# Altium PCB HT_L293D_Driver.PcbDoc
Units mm, origin at the board's own origin, x right, y up, seen from the top; angles counter-clockwise.
Board outline 48.87 x 70 mm, 2 copper layers (Top Layer, Bottom Layer), stack 0.388 mm thick; 40 components, 38 nets, 174 pads, 4 vias.
Unrouted connection lines stored in the file: 3.
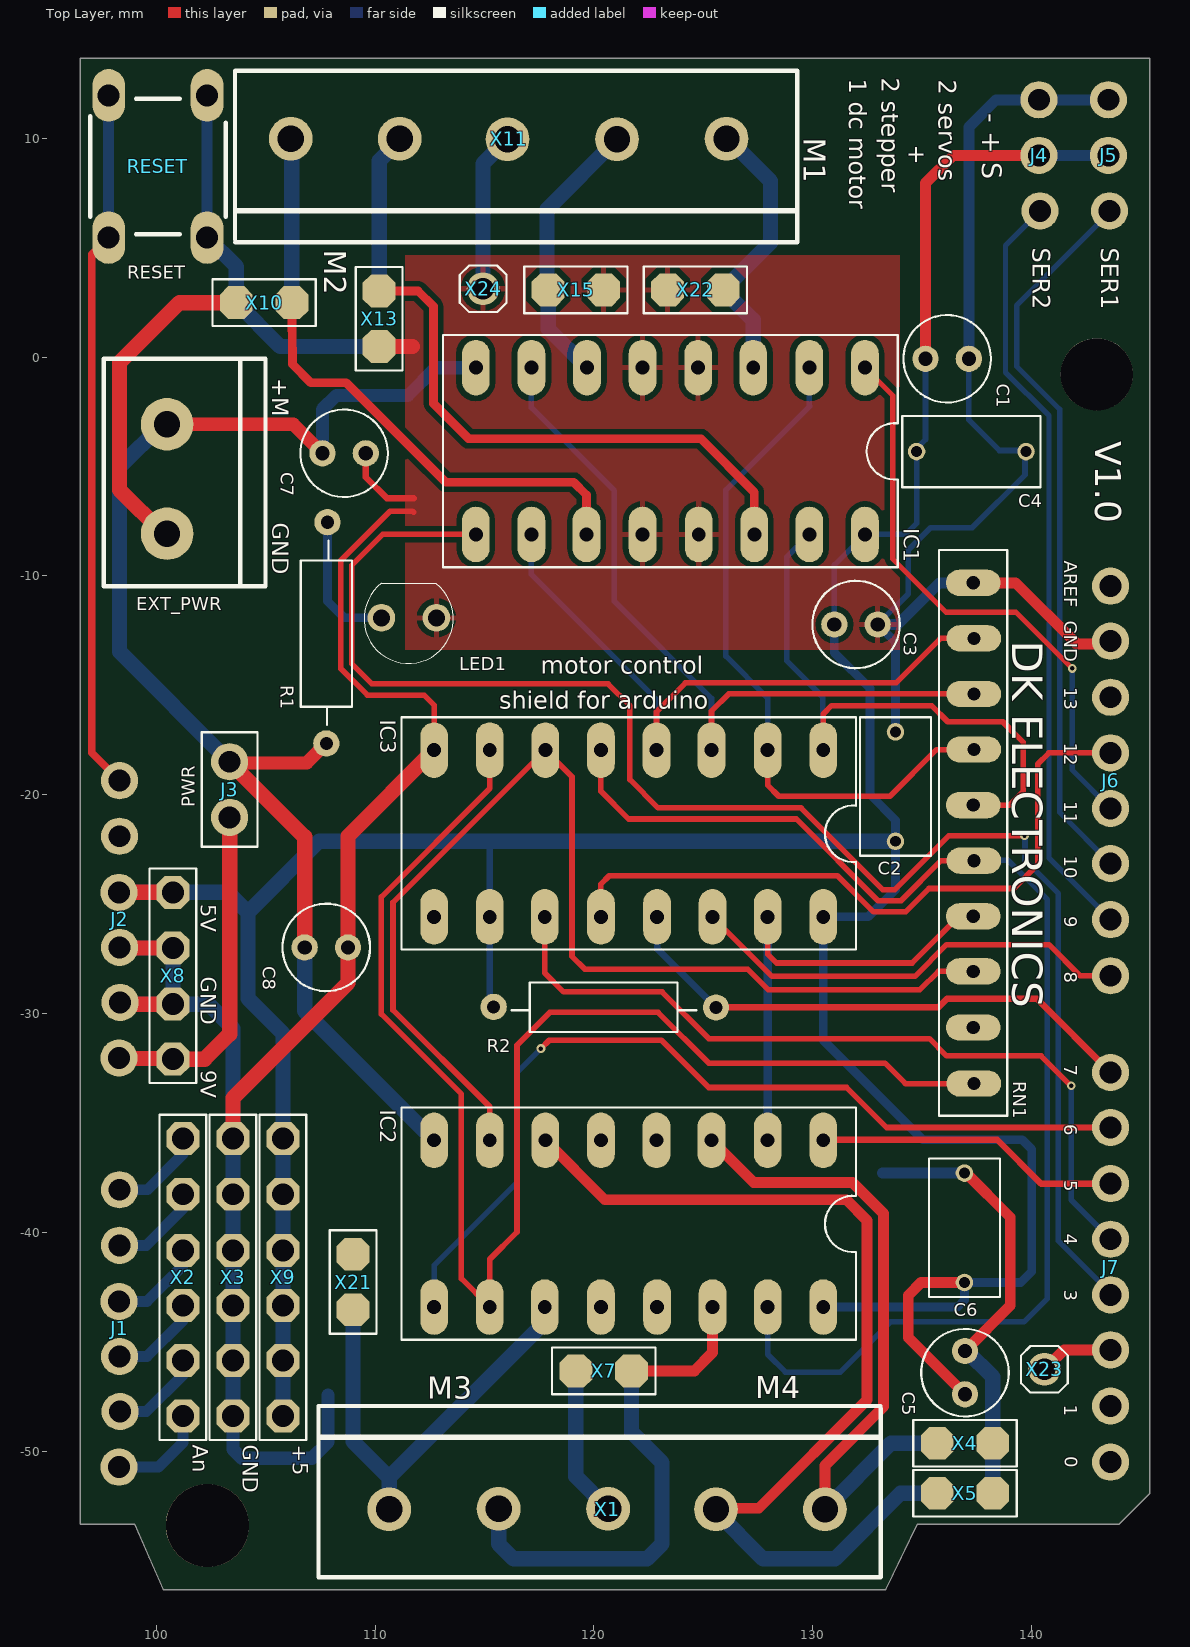
[diagram p0: Top Layer view]
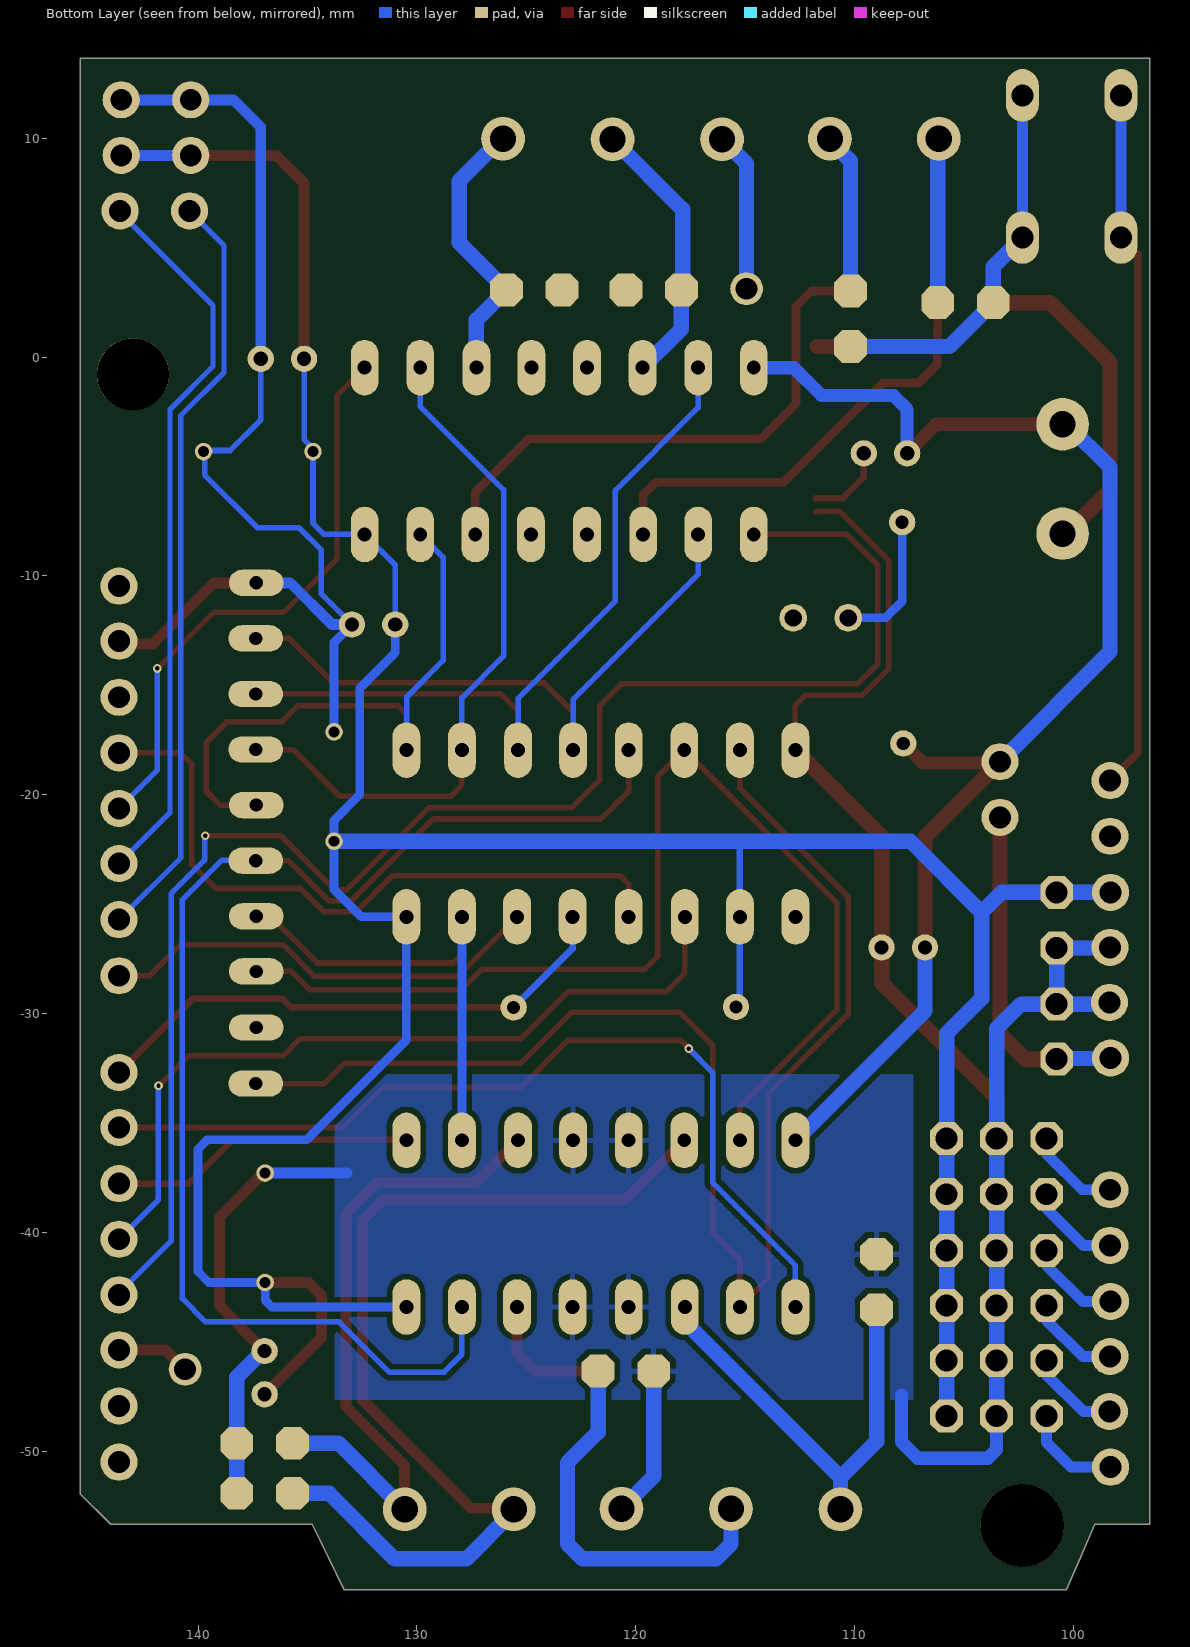
[diagram p1: Bottom Layer view, seen from below]
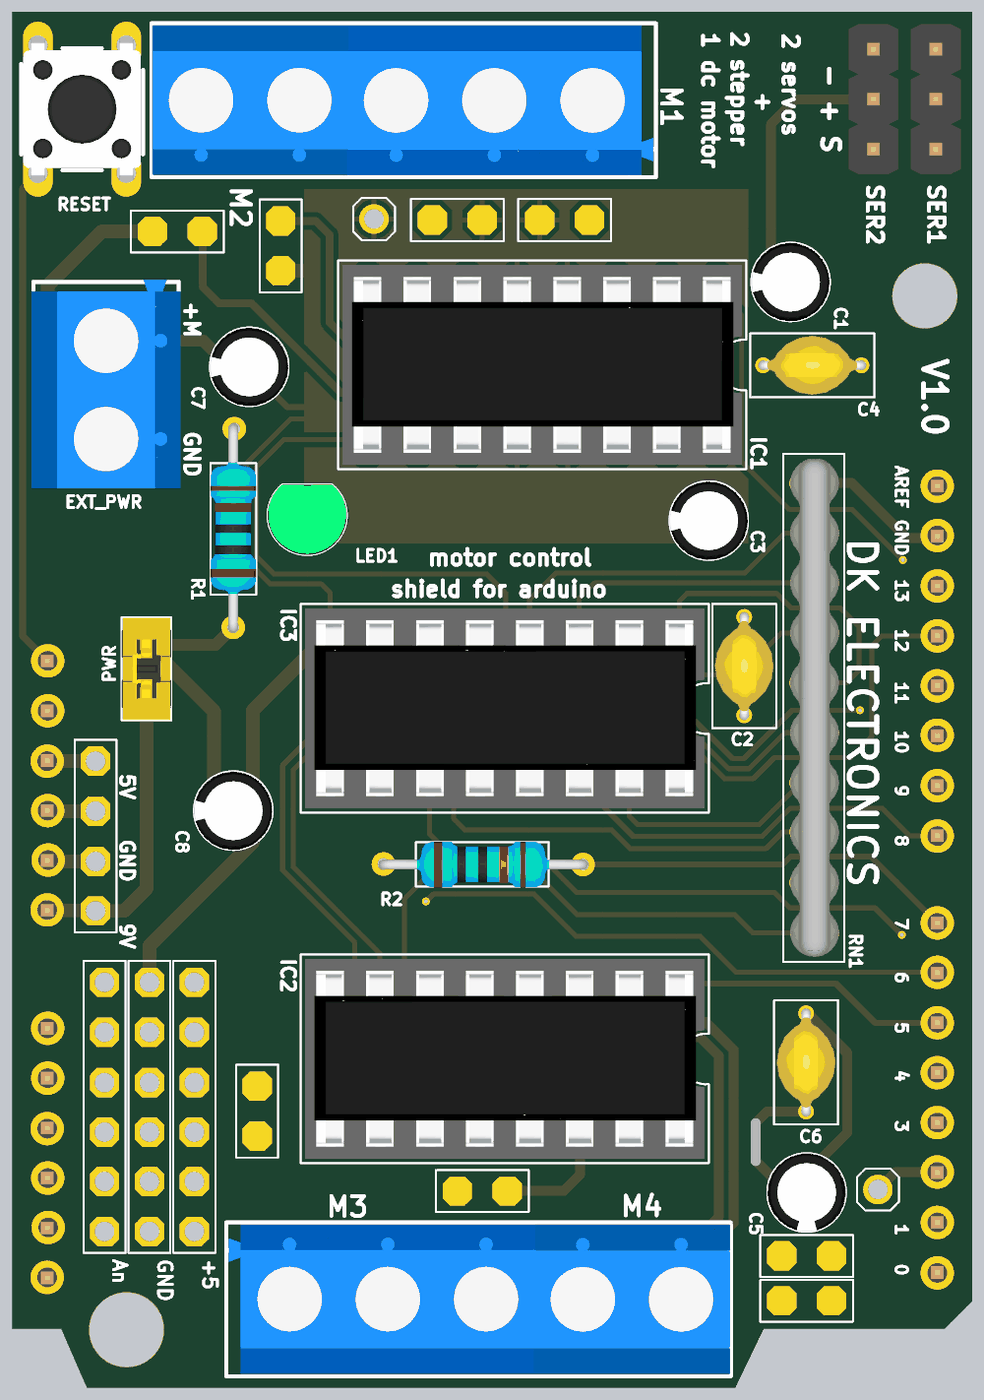
[diagram p2: 3D render of the assembled board from above, using the file's embedded part models]

## Layer stack, top to bottom
Top Solder: solder mask 0.0254, SM-001, Dk 4
Top Layer: signal copper 0.044
Dielectric 1: prepreg 0.3, PP-006, Dk 4.1
Bottom Layer: signal copper 0.044
Bottom Solder: solder mask 0.0254, SM-001, Dk 4

## Board outline
96.52,-53.335 96.52,13.665 145.39,13.665 145.39,-51.938 143.993,-53.335 134.772,-53.335 133.327,-56.335 100.33,-56.335 cw(c274.551,21.528) 99.02,-53.335

## Design rules (kind name [scope] priority, off if disabled: settings)
Clearance [All] p1: gap=0.254 ignorepadtopadclearanceinfootprint=FALSE except(0: Arc-Hole Track-Hole SMDPad-Hole THPad-Hole Via-Hole Fill-Hole Poly-Hole Region-Hole Text-Hole)
HoleSize [IsPad] p1: absolutevalues=TRUE maxlimit=2.54 minlimit=0.025 maxpercent=80.000 minpercent=20.000
PolygonConnect [All] p1: connectstyle=Relief reliefconductorwidth=0.254 reliefentries=4 polygonreliefangle="90 Angle" airgapwidth=0.254
RoutingVias [All] p1: holewidth=0.711 width=1.27 viastyle="Through Hole" minholewidth=0.711 minwidth=1.27 maxholewidth=0.711 maxwidth=1.27
SolderMaskExpansion [All] p1: expansion=0
Width [All] p1: maxlimit=0.254 minlimit=0.254 preferedwidth=0.254
29 further rules are at their usual default settings.

## Components (designator, comment, footprint, x,y, rotation, side; value= is the part's Value field where it differs from the comment)
C1 "Aluminum_Electrolytic_Capacitor" ALUMINUM_ELECTROLYTIC_CAPACITOR 134.722,-0.025 r0 top value=16VDC
C2 "Film capacitor, 10μF, 450VDC, ±10%, 10.9mOhm, 31.5x15 mm, -40...+105°C" CERAMIC_CAPACITOR_0.1UF 133.782,-22.123 r90 top value=10µF
C3 "Aluminum_Electrolytic_Capacitor" ALUMINUM_ELECTROLYTIC_CAPACITOR 130.556,-12.167 r0 top value=100uF
C4 "Film capacitor, 0.1μF, 450VDC, ±10%, 10.9mOhm, 31.5x15 mm, -40...+105°C" CERAMIC_CAPACITOR_0.1UF 134.747,-4.318 r0 top value=0.1µF
C5 "Aluminum_Electrolytic_Capacitor" ALUMINUM_ELECTROLYTIC_CAPACITOR 136.906,-47.828 r90 top value=100uF
C6 "Film capacitor, 0.1μF, 450VDC, ±10%, 10.9mOhm, 31.5x15 mm, -40...+105°C" CERAMIC_CAPACITOR_0.1UF 136.931,-42.287 r90 top value=0.1µF
C7 "Aluminum_Electrolytic_Capacitor" ALUMINUM_ELECTROLYTIC_CAPACITOR 107.163,-4.343 r0 top value=100uF
C8 "Aluminum_Electrolytic_Capacitor" ALUMINUM_ELECTROLYTIC_CAPACITOR 106.35,-26.924 r0 top value=100uF
EXT_PWR "Terminal connector, 2pin, 3.5mm, 300VAC, 10A" TERMINAL_BLOCK_2PIN 101.524,-5.563 r270 top
IC1 "L293D" L293D_WITH_DIP16 132.613,3.277 r270 top
IC2 "L293D" L293D_WITH_DIP16 130.708,-32.029 r270 top
IC3 "SN74HC595N" L293D_WITH_DIP16 130.708,-14.199 r270 top
J1 "Headers_6PIN" HEADERS_6PIN 98.4,-38.252 r0 top
J2 "Headers_6PIN" HEADERS_6PIN 98.4,-19.558 r0 top
J3 "Headers_2PIN" HEADERS_2PIN 103.454,-18.517 r0 top
J4 "Headers_3PIN" HEADERS_3PIN 140.462,11.709 r0 top
J5 "Headers_3PIN" HEADERS_3PIN 143.637,11.709 r0 top
J6 "Headers_8PIN" HEADERS_8PIN 143.561,-10.897 r0 top
J7 "Headers_8PIN" HEADERS_8PIN 143.561,-33.122 r0 top
LED1 "LED, Green, *, *, *, -55...+150°C" GREEN_LED_3MM 112.827,-12.141 r180 top
R1 "Resistor film, 1K, , 0201, 0.05W, -55...+125°C" RESISTOR_TH_1K 107.95,-17.704 r90 top value=1K
R2 "" RESISTOR_TH_10K 115.418,-29.845 r0 top value=10K
RESET "1825910-6" 1825910-6 100.076,8.712 r0 top
RN1 "Resistor_Network_10K" RESISTOR_NETWORK_10K 137.008,-10.109 r0 top
X1 "Terminal connector, 3pin, 3.5mm, 300VAC, 10A" TERMINAL_BLOCK_5PIN 115.621,-52.654 r0 top
X2 "Pad_6PIN" PAD_6PIN 101.27,-35.916 r0 top
X3 "Pad_6PIN" PAD_6PIN 103.556,-35.916 r0 top
X4 "Pad_2PIN" PAD_2PIN 135.89,-49.581 r90 top
X5 "Pad_2PIN" PAD_2PIN 135.89,-51.867 r90 top
X7 "Pad_2PIN" PAD_2PIN 119.38,-46.279 r90 top
X8 "Pad_4PIN" PAD_4PIN 100.813,-24.663 r0 top
X9 "Pad_6PIN" PAD_6PIN 105.842,-35.916 r0 top
X10 "Pad_2PIN" PAD_2PIN 103.861,2.54 r90 top
X11 "Terminal connector, 3pin, 3.5mm, 300VAC, 10A" TERMINAL_BLOCK_5PIN 121.082,9.982 r180 top
X13 "Pad_2PIN" PAD_2PIN 110.236,2.819 r0 top
X15 "Pad_2PIN" PAD_2PIN 118.11,3.124 r90 top
X21 "Pad_2PIN" PAD_2PIN 109.042,-41.199 r0 top
X22 "Pad_2PIN" PAD_2PIN 123.571,3.124 r90 top
X23 "Pad_1PIN" PAD_1PIN 140.64,-46.457 r0 top
X24 "Pad_1PIN" PAD_1PIN 114.986,2.921 r0 top

## Footprints (in the part's own frame and the unit in brackets; to place one, negate y for a bottom-side part, rotate by r counter-clockwise, add the part's x,y. Pads: shape width x height; smd on the part's side, far side on the other; paste and mask are expansions set on the pad)
1825910-6 [mm]
  oval 1.5x2.4 hole 1: 1(2.25,3.25) 2(2.25,-3.25) 3(-2.25,3.25) 4(-2.25,-3.25)
  silkscreen extent -3.1,-3.1 3.1,3.1, body extent -3,-3.9 2.99,3.9, height 5
ALUMINUM_ELECTROLYTIC_CAPACITOR [mm]
  round 1.2 hole 0.65: 1(0.432,-0.051) 2(2.413,-0.051)
  silkscreen extent -0.57,-2.05 3.42,1.95, body extent -0.57,-2.06 3.42,1.94, height 8.12
CERAMIC_CAPACITOR_0.1UF [mm]
  round 0.8 hole 0.5: 1(0,0) 2(5,0)
  silkscreen extent -0.66,-1.63 5.66,1.63, body extent -0.22,-1.5 5.22,1.5, height 4.72
GREEN_LED_3MM [mil]
  round 50 hole 30.71: 1(1,-9) 2(100,-9)
  silkscreen extent -29,-71 131,73, body extent -27,-68 130,70, height 220
HEADERS_2PIN [mm]
  round 1.7 hole 1: 1(-0.102,0.025) 2(-0.102,-2.515)
  silkscreen extent -1.37,-3.86 1.17,1.37, body extent -1.37,-3.84 1.17,1.36, height 8.8
HEADERS_3PIN [mm]
  round 1.7 hole 1: 1(-0.127,0.051) 2(-0.127,-2.489) 3(-0.076,-5.029)
  body extent -1.37,-6.3 1.17,1.32, height 8.76
HEADERS_6PIN [mm]
  round 1.7 hole 1: 1(-0.076,0.203) 2(-0.076,-2.337) 3(-0.102,-4.902) 4(-0.076,-7.417) 5(-0.051,-9.931) 6(-0.102,-12.471)
  body extent -1.37,-13.77 1.17,1.47, height 2.68
HEADERS_8PIN [mm]
  round 1.7 hole 1: 1(0.051,0.432) 2(0.051,-2.083) 3(0.051,-4.648) 4(0.051,-7.188) 5(0.051,-9.728) 6(0.051,-12.243) 7(0.051,-14.808) 8(0.051,-17.374)
  body extent -1.22,-18.62 1.32,1.7, height 2.68
L293D_WITH_DIP16 [mil]
  oval 100x50 hole 25: 1(148,-9) 2(148,-109) 3(148,-210) 4(148,-309) 5(148,-409) 6(148,-509) 7(148,-609) 8(148,-709) 9(448,-709) 10(448,-609) 11(448,-510) 12(448,-409) 13(448,-308) 14(448,-208) 15(448,-109) 16(448,-9)
  silkscreen extent 89,-768 507,50, body extent 98,-759 498,41, height 329
PAD_1PIN [mm]
  round 1.5 hole 1: 1(-0.051,0.203)
  silkscreen extent -1.12,-0.86 1.02,1.27
PAD_2PIN [mm]
  oct 1.5x1.5 all layers, no hole: 1(-0.051,0.203) 2(-0.051,-2.337)
  silkscreen extent -1.12,-3.43 1.02,1.3
PAD_4PIN [mm]
  oct 1.5x1.5 hole 1: 1(-0.051,0.203) 2(-0.051,-2.337) 3(-0.051,-4.902) 4(-0.051,-7.417)
  silkscreen extent -1.12,-8.51 1.02,1.3
PAD_6PIN [mm]
  oct 1.5x1.5 hole 1: 1(-0.051,0.203) 2(-0.051,-2.337) 3(-0.051,-4.902) 4(-0.051,-7.417) 5(-0.051,-9.931) 6(-0.051,-12.471)
  silkscreen extent -1.12,-13.56 1.02,1.3
RESISTOR_NETWORK_10K [mm]
  oval 2.5x1.2 hole 0.6: 1(0.33,-0.203) 2(0.356,-2.743) 3(0.356,-5.283) 4(0.356,-7.823) 5(0.33,-10.363) 6(0.356,-12.903) 7(0.33,-15.443) 8(0.33,-17.958) 9(0.33,-20.523) 10(0.356,-23.089)
  silkscreen extent -1.24,-24.56 1.88,1.3, body extent -0.89,-24.31 1.6,1.04, height 2.84
RESISTOR_TH_1K [mm]
  round 1.2 hole 0.6: 1(0.051,0.178) 2(10.16,0.127)
  silkscreen extent 0.89,-0.99 9.32,1.35, body extent -0.22,-0.99 10.43,1.35, height 2.51
RESISTOR_TH_10K [mm]
  round 1.2 hole 0.6: 1(0,0.152) 2(10.16,0.127)
  silkscreen extent 0.81,-0.99 9.27,1.27, body extent -0.25,-1.04 10.41,1.29, height 2.51
TERMINAL_BLOCK_2PIN [mm]
  round 2.4 hole 1.2: 1(2.506,-1.03) 2(-2.494,-1.03)
  silkscreen extent -5.49,-3.93 4.91,3.47, body extent -5.59,-4.03 5.01,3.57, height 10.13
TERMINAL_BLOCK_5PIN [mm]
  round 2 hole 1.2: 1(-4.978,0) 2(0.025,0.025) 3(5.029,0.025) 4(9.957,0) 5(14.935,0)
  silkscreen extent -8.2,-3.1 17.48,4.72, body extent -8.08,-2.99 17.45,4.62, height 10.13

## Part data
C1: "Capacitor Polarised", Manufacturer_Name="United Chemi-Con", Manufacturer_Part_Number=EKY-350ETC221MH15D, Mouser Part Number=N/A, Voltage=100uF, Datasheet Link=http://www.mouser.com/datasheet/2/420/United-Chemi-Con-1109128.pdf, Height=21.5mm, Mouser Price/Stock=https://www.mouser.com/Search/Refine.aspx?Keyword=N%2FA
C2: library part Ceramic_Capacitor, Manufacturer=Epcos, Package="31.5x15 mm", PartNumber=B32774D4106K000, Temperature=-40...+105°C, Tolerance=±10%, TypeCapacitor="Film capacitor", ValueManufacturerPartNumber="Film capacitor, 10µF, 450VDC, ±10%, 10.9mOhm, 31.5x15 mm, -40...+105°C", Voltage=450VDC, HelpURL=https://www.digikey.com/products/en/capacitors/film-capacitors/62?k=&pkeyword=&sv=0&pv2097=1958&sf=0&FV=fffc01ef%2C1f140000%2Cffe0003e%2Cffec6366&quantity=1&ColumnSort=1000011&page=1&stock=1&pageSize=25, Impedance=10.9mOhm
C3 C5 C7 C8: "Capacitor Polarised", Manufacturer_Name="United Chemi-Con", Manufacturer_Part_Number=EKY-350ETC221MH15D, Mouser Part Number=N/A, Voltage=16VDC, Datasheet Link=http://www.mouser.com/datasheet/2/420/United-Chemi-Con-1109128.pdf, Height=21.5mm, Mouser Price/Stock=https://www.mouser.com/Search/Refine.aspx?Keyword=N%2FA
C4: library part Ceramic_Capacitor, "Capacitor Non Polarised", Manufacturer=Epcos, Package="31.5x15 mm", PartNumber=B32774D4106K000, Temperature=-40...+105°C, Tolerance=±10%, TypeCapacitor="Film capacitor", ValueManufacturerPartNumber="Film capacitor, 0.1µF, 450VDC, ±10%, 10.9mOhm, 31.5x15 mm, -40...+105°C", Voltage=450VDC, HelpURL=https://www.digikey.com/products/en/capacitors/film-capacitors/62?k=&pkeyword=&sv=0&pv2097=1958&sf=0&FV=fffc01ef%2C1f140000%2Cffe0003e%2Cffec6366&quantity=1&ColumnSort=1000011&page=1&stock=1&pageSize=25, Impedance=10.9mOhm
C6: library part Ceramic_Capacitor, Manufacturer=Epcos, Package="31.5x15 mm", PartNumber=B32774D4106K000, Temperature=-40...+105°C, Tolerance=±10%, TypeCapacitor="Film capacitor", ValueManufacturerPartNumber="Film capacitor, 0.1µF, 450VDC, ±10%, 10.9mOhm, 31.5x15 mm, -40...+105°C", Voltage=450VDC, HelpURL=https://www.digikey.com/products/en/capacitors/film-capacitors/62?k=&pkeyword=&sv=0&pv2097=1958&sf=0&FV=fffc01ef%2C1f140000%2Cffe0003e%2Cffec6366&quantity=1&ColumnSort=1000011&page=1&stock=1&pageSize=25, Impedance=10.9mOhm
EXT_PWR: library part Terminal_Block_2PIN, CurrentMax=10A, Manufacturer=Degson, PartNumber=DG350-3.5-02P-14, VoltageMax=300VAC, CommentText="\"??????\"", HelpURL=https://www.chipdip.ru/product/dg350-3.5-02p-12, Multichannel=2pin, Pitch=3.5mm, TypeConnector="Terminal connector", ValueManufacturerPartNumber="Terminal connector, 2pin, 3.5mm, 300VAC, 10A"
IC1 IC2: "Integrated Circuit", Manufacturer_Name=STMicroelectronics, Mouser Part Number=511-L293D, Arrow Part Number=L293D, Arrow Price/Stock=https://www.arrow.com/en/products/l293d/stmicroelectronics?region=nac, Datasheet Link=http://www.st.com/web/en/resource/technical/document/datasheet/CD00000059.pdf, Height=5.1mm, Manufacturer_Part_Number=L293D, Mouser Price/Stock=https://www.mouser.co.uk/ProductDetail/STMicroelectronics/L293D?qs=gr8Zi5OG3MgMJ1ICDzLQbg%3D%3D
IC3: "Integrated Circuit", Manufacturer_Name="Texas Instruments", Mouser Part Number=595-SN74HC595N, Arrow Part Number=SN74HC595N, Arrow Price/Stock=https://www.arrow.com/en/products/sn74hc595n/texas-instruments?region=nac, Datasheet Link=http://www.ti.com/lit/ds/symlink/sn74hc595.pdf, Height=5.08mm, Manufacturer_Part_Number=SN74HC595N, Mouser Price/Stock=https://www.mouser.co.uk/ProductDetail/Texas-Instruments/SN74HC595N?qs=IEl3ej0IqwBTHkYa8XPoMQ%3D%3D
J1 J2 J3 J4 J5 J6 J7: Package=None, Availability=Unavailable, MF="{'manufacturer': u'TE Connectivity'}", MP=87227-3, Price=None
LED1: library part Green_LED_3mm, ColorParameter=Green, Temperature=-55...+150°C, TypeDiode=LED, ValueManufacturerPartNumber="LED, Green, *, *, *, -55...+150°C"
R1: library part Resistor_1K, Manufacturer=Yageo, Package=0201, PartNumber=RC0201JR-07100RL, Power=0.05W, Temperature=-55...+125°C, TypeResistor="Resistor film", HelpURL=https://www.digikey.com/product-detail/en/yageo/RC0201JR-07100RL/311-100NCT-ND/1949006, ValueManufacturerPartNumber="Resistor film, 1K, , 0201, 0.05W, -55...+125°C"
R2: library part Resistor_10K, Manufacturer=Yageo, Package=0201, PartNumber=RC0201JR-07100RL, Power=0.05W, Temperature=-55...+125°C, TypeResistor="Resistor film", ValueManufacturerPartNumber="Resistor film, 10K, , 0201, 0.05W, -55...+125°C", HelpURL=https://www.digikey.com/product-detail/en/yageo/RC0201JR-07100RL/311-100NCT-ND/1949006
RESET: library part Button_Reset, "SWITCH TACTILE SPST-NO 0.05A 24V", Contact Rating @ Voltage="0.05A @ 24VDC", Illumination Type, Color=-, Manufacturer="TE Connectivity", Operating Force=160gf, Operating Temperature="-35°C ~ 85°C", Supplier Part Number 1=450-1650-ND, .Checked PCB=RF, .Checked SCH=RF, .Creator=MM, Actuator Height off PCB, from Pins=5.00mm, Actuator Material="Polybutylene Terephthalate (PBT)", Actuator Orientation="Top Actuated", Actuator Type=Standard, Category=Switches, Circuit=SPST-NO, ComponentLink1Description=http://www.te.com/commerce/DocumentDelivery/DDEController?Action=srchrtrv&DocNm=1825910&DocType=Customer+Drawing&DocLang=English, ComponentLink1URL=http://www.te.com/commerce/DocumentDelivery/DDEController?Action=srchrtrv&DocNm=1825910&DocType=Customer+Drawing&DocLang=English, Features=-, Illumination=Non-Illuminated, Illumination Voltage (Nominal)=-, Ingress Protection=-, Manufacturer Part Number=1825910-6, Mechanical Life="100,000 Cycles", Mounting Type="Through Hole", Outline="6.00mm x 6.00mm", Packaging=Bulk, Pricing 1="1=0.1, 10=0.095, 25=0.0912, 50=0.088, 100=0.0831, 250=0.07824, 500=0.07498, 1000=0.05705 (USD)", RoHS="RoHS Compliant", Stock 1=181823, Supplier 1=Digi-Key, Switch Function=Off-Mom, Switch Travel=0.25mm, Termination Style="PC Pin"
X1 X11: library part Terminal_Block_5PIN, CurrentMax=10A, Manufacturer=Degson, PartNumber=DG350-3.5-03P-14, VoltageMax=300VAC, CommentText="\"??????\"", HelpURL=https://www.chipdip.ru/product/dg350-3.5-03p-12, Multichannel=3pin, Pitch=3.5mm, TypeConnector="Terminal connector", ValueManufacturerPartNumber="Terminal connector, 3pin, 3.5mm, 300VAC, 10A"

## Free pads (board coordinates)
  round 3.8 hole 3.8: 10(102.337,-53.391)
  round 3.3 hole 3.3: 11(142.977,-0.787)

## Via types
v1: diameter 0.4, hole 0.2, Top Layer to Bottom Layer, 4 vias

## Nets (pads, with @x,y where several pads share a name; then routed paths per layer and width w, separated by ;. In a path a pad name is that pad's centre, name@x,y a point inside that pad or via, vN(x,y) a via of type N, cw(c..) or ccw(c..) an arc to the next point about the centre after c; other vN are vias at no path point)
+9: C7.1 C8.1 EXT_PWR.2 IC1.8 IC2.8 J2.6 J3.1 J3.2 R1.1 X8.4 | length 79.8
  Top Layer w0.254: J2.6 J2.6@98.323,-32.055 ; X8.4@100.736,-32.055 X8.4 ; J3.1 J3.1@103.403,-18.542
  Top Layer w0.6: EXT_PWR.2 106.269,-3.069 C7.1 ; J3.1@103.403,-18.542 106.883,-18.542 R1.1
  Top Layer w0.7: J2.6@98.323,-32.055 X8.4@100.736,-32.055 ; X8.4 102.21,-32.08 103.353,-30.937 J3.2 ; J3.1@103.403,-18.542 106.782,-21.92 C8.1
  Bottom Layer w0.254: J2.6 J2.6@98.323,-32.055 ; EXT_PWR.2@100.284,-3.069 EXT_PWR.2 ; X8.4@100.736,-32.055 X8.4
  Bottom Layer w0.6: C7.1 107.594,-2.388 108.229,-1.753 111.506,-1.753 112.776,-0.483 IC1.8
  Bottom Layer w0.7: J2.6@98.323,-32.055 X8.4@100.736,-32.055 ; EXT_PWR.2@100.284,-3.069 98.323,-5.029 98.323,-13.462 J3.1 ; C8.1 106.782,-29.87 IC2.8
GND: C1.2 C2.2 C3.2 C4.2 C5.2 C6.2 C7.2 C8.2 EXT_PWR.1 IC1.4 IC1.5 IC1.12 IC1.13 IC2.4 IC2.5 IC2.12 IC2.13 IC3.8 J2.4 J2.5 J4.1 J5.1 J6.2 LED1.1 RESET.1 RESET.2 RN1.1 X1.3 X3.1 X3.2 X3.4 X3.5 X3.6 X4.2 X5.2 X8.2 X8.3 X11.3 X13.2 X15.2 X24.1 | length 205.7
  Top Layer w0.254: J2.4 J2.4@98.349,-27 ; J2.5 J2.5@98.425,-29.566 ; EXT_PWR.1@100.322,-8.069 EXT_PWR.1 ; 111.76,-7.087 111.709,-7.036 110.693,-7.036 108.432,-9.297 108.432,-14.23 109.645,-15.443 112.243,-15.443 112.7,-15.9 IC3.8 ; C6.2 C6.2@137.008,-37.287
  Top Layer w0.3: C7.2 109.576,-5.486 110.541,-6.452 111.76,-6.452
  Top Layer w0.5: C5.2 139.027,-43.345 139.027,-39.306 C6.2@137.008,-37.287 ; RN1.1 139.268,-10.312 142.046,-13.09 ; 142.046,-13.106 J6.2@143.485,-13.106
  Top Layer w0.7: J2.4@98.349,-27 X8.2 ; J2.5@98.425,-29.566 X8.3 ; EXT_PWR.1@100.322,-8.069 98.323,-6.071 98.323,-0.254 101.067,2.489 103.657,2.489 ; X3.1 103.505,-33.858 108.763,-28.6 C8.2 108.763,-21.895 IC3.8 ; X13.2 111.709,0.483
  Bottom Layer w0.254: J2.4 J2.4@98.349,-27 ; J2.5 J2.5@98.425,-29.566 ; 107.848,-47.422 107.95,-47.32 ; C3.2 134.366,-10.82 134.366,-8.814 135.382,-7.798 137.287,-7.798 139.7,-5.385 139.7,-4.365 C4.2 139.696,-4.267 138.532,-4.267 137.135,-2.87 C1.2 ; C5.2 137.033,-45.415 C5.2@137.185,-45.415 ; X4.2 X4.2@138.278,-49.581 ; J6.2@143.485,-13.106 J6.2
  Bottom Layer w0.4: C3.2@132.994,-12.243 133.782,-13.03 C2.2
  Bottom Layer w0.5: RESET.2 RESET.1 ; C3.2 133.883,-12.217 135.788,-10.312 RN1.1 ; 133.198,-37.287 C6.2 ; C1.2 137.135,10.516 138.379,11.76 J4.1 J5.1
  Bottom Layer w0.6: X3.6 103.505,-49.911 103.911,-50.317 107.112,-50.317 107.848,-49.581 107.848,-47.422
  Bottom Layer w0.7: J2.4@98.349,-27 X8.2 X8.3 ; J2.5@98.425,-29.566 X8.3 ; RESET.2 103.657,4.131 103.657,2.489 105.664,0.483 X13.2 ; X3.6 X3.5 X3.4 X3.2 X3.1 103.505,-30.683 102.387,-29.566 X8.3 ; X24.1 114.935,8.839 X11.3 ; 119.177,-46.457 119.177,-51.156 X1.3 ; C5.2@137.033,-45.415 138.227,-46.609 X4.2 X5.2
NetIC1_1: IC1.1 J6.5 | length 26.7
  Top Layer w0.24: IC1.1 133.655,-1.753 133.655,-9.22 136.093,-11.659 139.294,-11.659 v1(141.859,-14.224)
  Bottom Layer w0.24: v1(141.859,-14.224) 141.859,-18.872 J6.5
NetIC1_2: IC1.2 IC3.2 RN1.4 | length 32
  Top Layer w0.254: IC3.2 127.94,-19.558 128.448,-20.066 133.528,-20.066 135.661,-17.932 RN1.4
  Bottom Layer w0.254: IC3.2@127.965,-17.932 IC3.2 127.94,-15.57 126.035,-13.665 126.035,-6.073 129.854,-2.254 129.845,-2.245 IC1.2
NetIC1_3: IC1.3 X11.1 X22.2 | length 12.8
  Bottom Layer w0.254: X11.1 X11.1@126.136,9.982
  Bottom Layer w0.7: X11.1@126.136,9.982 128.067,8.052 128.067,5.232 X22.2 127.279,1.702 IC1.3
NetIC1_6: IC1.6 X11.2 | length 12.5
  Bottom Layer w0.254: 117.856,3.124 117.907,3.073
  Bottom Layer w0.7: 117.856,3.124 117.856,6.756 X11.2 ; 117.913,3.073 117.913,1.289 IC1.6
NetIC1_7: IC1.7 IC3.3 RN1.3 | length 35
  Top Layer w0.254: IC3.3 125.374,-16.18 126.162,-15.392 RN1.3
  Bottom Layer w0.254: IC1.7 117.145,-2.311 120.929,-6.096 120.929,-11.151 125.374,-15.596 IC3.3
NetIC1_9: IC1.9 J7.5 | length 71.4
  Top Layer w0.254: IC1.9 110.345,-8.103 108.94,-9.508 108.94,-14.02 109.855,-14.935 120.65,-14.935 121.641,-15.926 121.641,-19.304 122.936,-20.599 129.464,-20.599 133.198,-24.333 133.756,-24.333 136.22,-21.869 v1(139.675,-21.869)
  Bottom Layer w0.254: v1(139.675,-21.869) 139.7,-21.895 139.7,-22.987 141.227,-24.514 141.227,-40.389 143.612,-42.774 J7.5
NetIC1_10: IC1.10 IC3.4 RN1.2 | length 29.9
  Top Layer w0.254: IC3.4 122.86,-16.205 124.181,-14.884 133.807,-14.884 135.839,-12.852 RN1.2
  Bottom Layer w0.254: IC1.10 117.145,-9.931 122.86,-15.646 IC3.4
NetIC1_11: IC1.11 X10.2 X11.5 | length 28
  Top Layer w0.254: 106.223,-0.33 106.223,-0.203
  Top Layer w0.4: X10.2 106.223,-0.203 ; 106.223,-0.33 107.061,-1.168 108.687,-1.168 113.233,-5.715 119.075,-5.715 119.659,-6.299 IC1.11
  Bottom Layer w0.254: X11.5 X11.5@106.197,9.931
  Bottom Layer w0.7: X10.2 X11.5@106.197,9.931
NetIC1_14: IC1.14 X11.4 | length 32.8
  Top Layer w0.4: 110.185,3.023 111.963,3.023 112.674,2.311 112.674,-2.134 114.275,-3.734 124.892,-3.734 127.33,-6.172 IC1.14
  Bottom Layer w0.254: X11.4@111.125,9.909 X11.4
  Bottom Layer w0.7: 110.185,3.023 110.185,8.969 X11.4@111.125,9.909
NetIC1_15: IC1.15 IC3.1 RN1.5 | length 27.4
  Top Layer w0.254: IC3.1 130.48,-16.307 130.861,-15.926 135.433,-15.926 136.169,-16.662 138.684,-16.662 139.624,-17.602 139.624,-19.837 138.989,-20.472 RN1.5
  Bottom Layer w0.254: IC1.15 128.803,-9.144 128.803,-13.868 130.454,-15.519 130.454,-17.932 IC3.1
NetIC2_1: IC2.1 J7.3 | length 14
  Top Layer w0.254: IC2.1 IC2.1@130.505,-35.763
  Top Layer w0.3: IC2.1@130.505,-35.763 138.43,-35.763 140.437,-37.77 J7.3
NetIC2_2: IC2.2 IC3.15 RN1.7 | length 22.4
  Top Layer w0.254: IC3.15 127.94,-27.28 128.346,-27.686 134.544,-27.686 136.703,-25.527 137.312,-25.527 RN1.7
  Bottom Layer w0.4: IC2.2 IC3.15
NetIC2_3: IC2.3 X1.5 | length 30.3
  Top Layer w0.5: IC2.3 127.305,-37.719 131.826,-37.719 133.24,-39.134 133.24,-47.963 130.556,-50.648 X1.5
  Bottom Layer w0.7: X1.5 133.579,-49.632 135.687,-49.632
NetIC2_6: IC2.6 X1.4 | length 45.8
  Top Layer w0.254: X1.4 X1.4@125.628,-52.603
  Top Layer w0.5: IC2.6 120.498,-38.506 131.547,-38.506 132.486,-39.446 132.486,-47.651 127.534,-52.603 X1.4@125.628,-52.603
  Bottom Layer w0.254: X1.4@125.578,-52.756 X1.4
  Bottom Layer w0.7: X1.4@125.578,-52.756 127.737,-54.915 131.013,-54.915 134.01,-51.918 135.687,-51.918
NetIC2_7: IC2.7 IC3.6 RN1.8 | length 51.8
  Top Layer w0.254: IC2.7 115.24,-34.257 110.82,-29.838 110.82,-24.917 IC3.6 118.999,-19.177 118.999,-27.381 119.583,-27.965 127.025,-27.965 127.965,-28.905 134.899,-28.905 135.738,-28.067 RN1.8
NetIC2_9: IC2.9 J7.2 | length 41.7
  Top Layer w0.254: v1(117.577,-31.598) 117.958,-31.217 123.088,-31.217 125.247,-33.376 131.547,-33.376 133.375,-35.204 J7.2
  Bottom Layer w0.254: IC2.9 112.7,-41.504 116.484,-37.719 116.484,-32.69 v1(117.577,-31.598)
NetIC2_10: IC2.10 IC3.7 RN1.10 | length 64.9
  Top Layer w0.254: IC3.7 115.24,-19.71 110.287,-24.663 110.287,-30.023 113.944,-33.68 113.944,-42.113 IC2.10 115.24,-41.224 116.484,-39.98 116.484,-31.445 117.983,-29.947 122.936,-29.947 125.247,-32.258 133.299,-32.258 134.239,-33.198 RN1.10
NetIC2_11: IC2.11 X1.1 X21.2 | length 20.4
  Bottom Layer w0.7: X21.2 108.991,-49.555 110.642,-51.206 ; X1.1 110.642,-51.206 ; IC2.11@117.754,-44.094 110.642,-51.206
  Bottom Layer w0.8: IC2.11@117.754,-44.094 IC2.11@117.754,-43.51
NetIC2_14: IC2.14 X1.2 X7.2 | length 24.3
  Top Layer w0.5: X7.2 124.587,-46.33 125.425,-45.491 IC2.14
  Bottom Layer w0.7: X1.2 115.646,-54.229 116.332,-54.915 122.428,-54.915 123.114,-54.229 123.114,-50.521 121.717,-49.124 X7.2
NetIC2_15: IC2.15 IC3.5 RN1.6 | length 60.8
  Top Layer w0.254: IC3.5 120.32,-19.837 121.59,-21.107 129.253,-21.107 132.987,-24.841 134.036,-24.841 135.865,-23.012 RN1.6
  Bottom Layer w0.254: IC2.15 127.94,-45.568 128.753,-46.38 131.267,-46.38 133.558,-44.09 139.654,-44.09 140.719,-43.024 140.719,-24.794 138.913,-22.987 137.389,-22.987 RN1.6 RN1.6@137.389,-23.038
NetIC3_11: IC3.11 J7.4 | length 36.5
  Top Layer w0.254: IC3.11 117.754,-28.143 118.618,-29.007 123.114,-29.007 125.247,-31.14 135.331,-31.14 136.119,-31.928 140.437,-31.928 v1(141.808,-33.299)
  Bottom Layer w0.254: v1(141.808,-33.299) 141.808,-38.506 J7.4
NetIC3_12: IC3.12 J6.4 | length 31.3
  Top Layer w0.254: IC3.12 120.32,-24.079 120.701,-23.698 131.126,-23.698 132.777,-25.349 134.246,-25.349 135.313,-24.282 139.192,-24.282 140.284,-23.19 140.284,-18.593 140.792,-18.085 J6.4
NetIC3_13: IC3.13 J7.1 R2.2 | length 24.9
  Top Layer w0.3: R2.2 135.738,-29.718 136.144,-29.312 140.233,-29.312 J7.1
  Bottom Layer w0.3: IC3.13 122.885,-27.026 R2.2
NetIC3_14: IC3.14 J6.8 | length 20.5
  Top Layer w0.254: IC3.14 128.143,-28.296 134.671,-28.296 136.119,-26.848 140.792,-26.848 142.215,-28.27 J6.8
NetJ1_1: J1.1 X2.1 | length 4.3
  Bottom Layer w0.5: J1.1 99.593,-38.049 101.219,-36.424 X2.1
NetJ1_2: J1.2 X2.2 | length 4.3
  Bottom Layer w0.5: J1.2 99.543,-40.589 101.219,-38.913 X2.2
NetJ1_3: J1.3 | length 4.3
  Bottom Layer w0.254: 101.219,-40.843 101.219,-40.818
  Bottom Layer w0.5: J1.3 99.568,-43.155 101.219,-41.504 101.219,-40.818
NetJ1_4: J1.4 X2.4 | length 4.5
  Bottom Layer w0.254: X2.4@100.94,-43.332 X2.4
  Bottom Layer w0.5: J1.4 99.568,-45.669 101.219,-44.018 X2.4
NetJ1_5: J1.5 X2.5 | length 4.3
  Bottom Layer w0.254: X2.5@101.143,-45.847 X2.5
  Bottom Layer w0.5: J1.5 99.543,-48.184 101.219,-46.507 X2.5
NetJ1_6: J1.6 X2.6 | length 4.6
  Bottom Layer w0.5: J1.6 100.101,-50.724 101.219,-49.606 X2.6
NetJ2_1: J2.1 RESET.3 RESET.4 | length 32.2
  Top Layer w0.35: RESET.4 97.053,4.69 97.053,-18.085 J2.1
  Bottom Layer w0.5: RESET.4 RESET.3
NetJ4_3: J4.3 J6.7 | length 35
  Bottom Layer w0.24: J4.3 138.811,5.105 138.811,-0.695 140.791,-2.675 140.791,-22.884 J6.7
NetJ5_3: J5.3 J6.6 | length 33.4
  Bottom Layer w0.24: J5.3@143.561,6.604 139.319,2.362 139.319,-0.419 141.285,-2.385 141.285,-20.813 J6.6
  Bottom Layer w0.254: J5.3@143.561,6.604 J5.3
NetJ7_6: J7.6 X23.1 | length 3.4
  Top Layer w0.5: X23.1 141.478,-45.364 J7.6
NetLED1_2: LED1.2 R1.2 | length 6.4
  Bottom Layer w0.4: R1.2 107.823,-11.151 108.585,-11.913 LED1.2
VCC: C1.1 C2.1 C3.1 C4.1 C5.1 C6.1 IC1.16 IC2.16 IC3.10 IC3.16 J2.3 J4.2 J5.2 R2.1 X8.1 X9.1 X9.2 X9.4 X9.5 X9.6 | length 161.9
  Top Layer w0.5: C1.1 135.153,7.95 136.423,9.22 J4.2 ; C6.1 134.954,-42.287 134.366,-42.875 134.366,-44.806 C5.1
  Top Layer w0.7: J2.3 X8.1
  Bottom Layer w0.254: 115.214,-22.123 115.24,-22.149 ; C3.1 130.988,-9.5 IC1.16 134.239,-8.103 134.747,-7.595 C4.1 134.747,-4.17 135.153,-3.764 C1.1 ; C6.1 C6.1@136.935,-42.291
  Bottom Layer w0.3: 115.24,-22.149 IC3.10 115.24,-29.515 R2.1
  Bottom Layer w0.4: IC2.16 136.627,-43.409 136.931,-43.104 C6.1 ; C3.1 130.988,-13.513 132.613,-15.138 132.613,-19.99 133.782,-21.158 C2.1 133.782,-24.333 132.537,-25.578 IC3.16 130.48,-31.217 135.026,-35.763 139.573,-35.763 140.005,-36.195 140.005,-41.783 139.497,-42.291 C6.1@136.935,-42.291
  Bottom Layer w0.5: J4.2 J5.2
  Bottom Layer w0.7: J2.3 X8.1 103.276,-24.46 104.191,-25.375 ; X9.6 X9.5 X9.4 105.791,-40.818 X9.2 X9.1 105.791,-30.912 104.191,-29.312 104.191,-25.375 ; C2.1 115.214,-22.123 107.442,-22.123 104.191,-25.375
pads on no net: IC3.9 J2.2 J6.1 J6.3 J7.7 J7.8 RN1.9 X2.3 X3.3 X4.1 X5.1 X7.1 X9.3 X10.1 X13.1 X15.1 X21.1 X22.1

## Polygon pours and split planes (outlines as drawn)
GND on Bottom Layer "Bottom Layer-GND" (solid, pour order 40): 107.315,-32.766 107.315,-47.65 133.756,-47.65 133.756,-32.766
no net on Bottom Layer "Bottom Layer-No Net" (solid, pour order 44): 133.281,-0.84
no net on Bottom Layer "Bottom Layer-No Net 1" (solid, pour order 30): 107.442,-47.803
no net on Bottom Layer "Bottom Layer-No Net 2" (solid, pour order 28): 107.315,-31.42
GND on Top Layer "Top Layer-GND" (solid, pour order 42): 111.379,4.648 111.379,-13.373 133.985,-13.373 133.985,4.648

## Silkscreen, mask and mechanical layers (free items; w line width, h text height)
Top Overlay:
  pour cut-out: 119.304,-43.942
  pour cut-out: 119.736,-45.364
  text "2 stepper" at 133.147,12.776 h0.8 r270
  text "1 dc motor" at 131.674,12.725 h0.8 r270
  text "2 servos" at 135.763,12.675 h0.8 r270
  text "- + S" at 137.757,11.138 h0.9 r270
  text "M1" at 129.591,10.033 h1 r270
  text "+" at 134.391,9.703 h0.8 r270
  text "SER2" at 140.056,5.004 h0.8 r270
  text "SER1" at 143.18,5.004 h0.8 r270
  text "M2" at 107.671,4.902 h1 r270
  text "+M" at 105.308,-0.965 h0.75 r270
  text "V1.0" at 142.9,-3.835 h1.2 r270
  text "GND" at 105.308,-7.569 h0.75 r270
  text "AREF" at 141.503,-9.296 h0.6 r270
  text "GND" at 141.503,-12.04 h0.6 r270
  text "DK ELECTRONICS" at 139.116,-12.954 h1.4 r270
  text "motor control" at 117.577,-14.478 h0.8
  text "13" at 141.503,-15.088 h0.6 r270
  text "shield for arduino" at 115.672,-16.078 h0.8
  text "12" at 141.503,-17.628 h0.6 r270
  text "11" at 141.503,-20.295 h0.6 r270
  text "PWR" at 101.752,-20.574 h0.6 r90
  text "10" at 141.503,-22.784 h0.6 r270
  text "5V" at 102.032,-24.994 h0.7 r270
  text "9" at 141.503,-25.552 h0.6 r270
  text "8" at 141.503,-28.092 h0.6 r270
  text "GND" at 102.032,-28.321 h0.7 r270
  text "7" at 141.503,-32.334 h0.6 r270
  text "9V" at 102.032,-32.588 h0.7 r270
  text "6" at 141.503,-35.052 h0.6 r270
  text "5" at 141.503,-37.617 h0.6 r270
  text "4" at 141.503,-40.056 h0.6 r270
  text "3" at 141.503,-42.621 h0.6 r270
  text "M4" at 127.381,-47.574 h1
  text "M3" at 112.395,-47.6 h1
  text "1" at 141.503,-47.879 h0.6 r270
  text "An" at 101.665,-49.705 h0.7 r270
  text "GND" at 103.962,-49.708 h0.7 r270
  text "+5" at 106.248,-49.708 h0.7 r270
  text "0" at 142.113,-50.749 h0.6 r90
Mechanical 1:
  lines w0.254: 96.52,-53.335 99.035,-53.335 ccw(c140.189,-37.344) 100.33,-56.335 133.325,-56.335 ccw(c-303.867,156.503) 134.772,-53.335 144.018,-53.335 cw(c190.895,-98.16) 145.39,-51.943 145.39,13.665 96.52,13.665 96.52,-53.335